# Altium PCB SLT_4U_V100.PcbDoc (part 2 of 6)
Units mm, origin at the board's own origin, x right, y up, seen from the top; angles counter-clockwise.
Board outline 180 x 80 mm, 5 copper layers (Top Layer, Mid-Layer 1, Mid-Layer 2, Mid-Layer 4, Bottom Layer); 1167 components, 840 nets, 3922 pads, 254 vias.
Unrouted connection lines stored in the file: 1943.
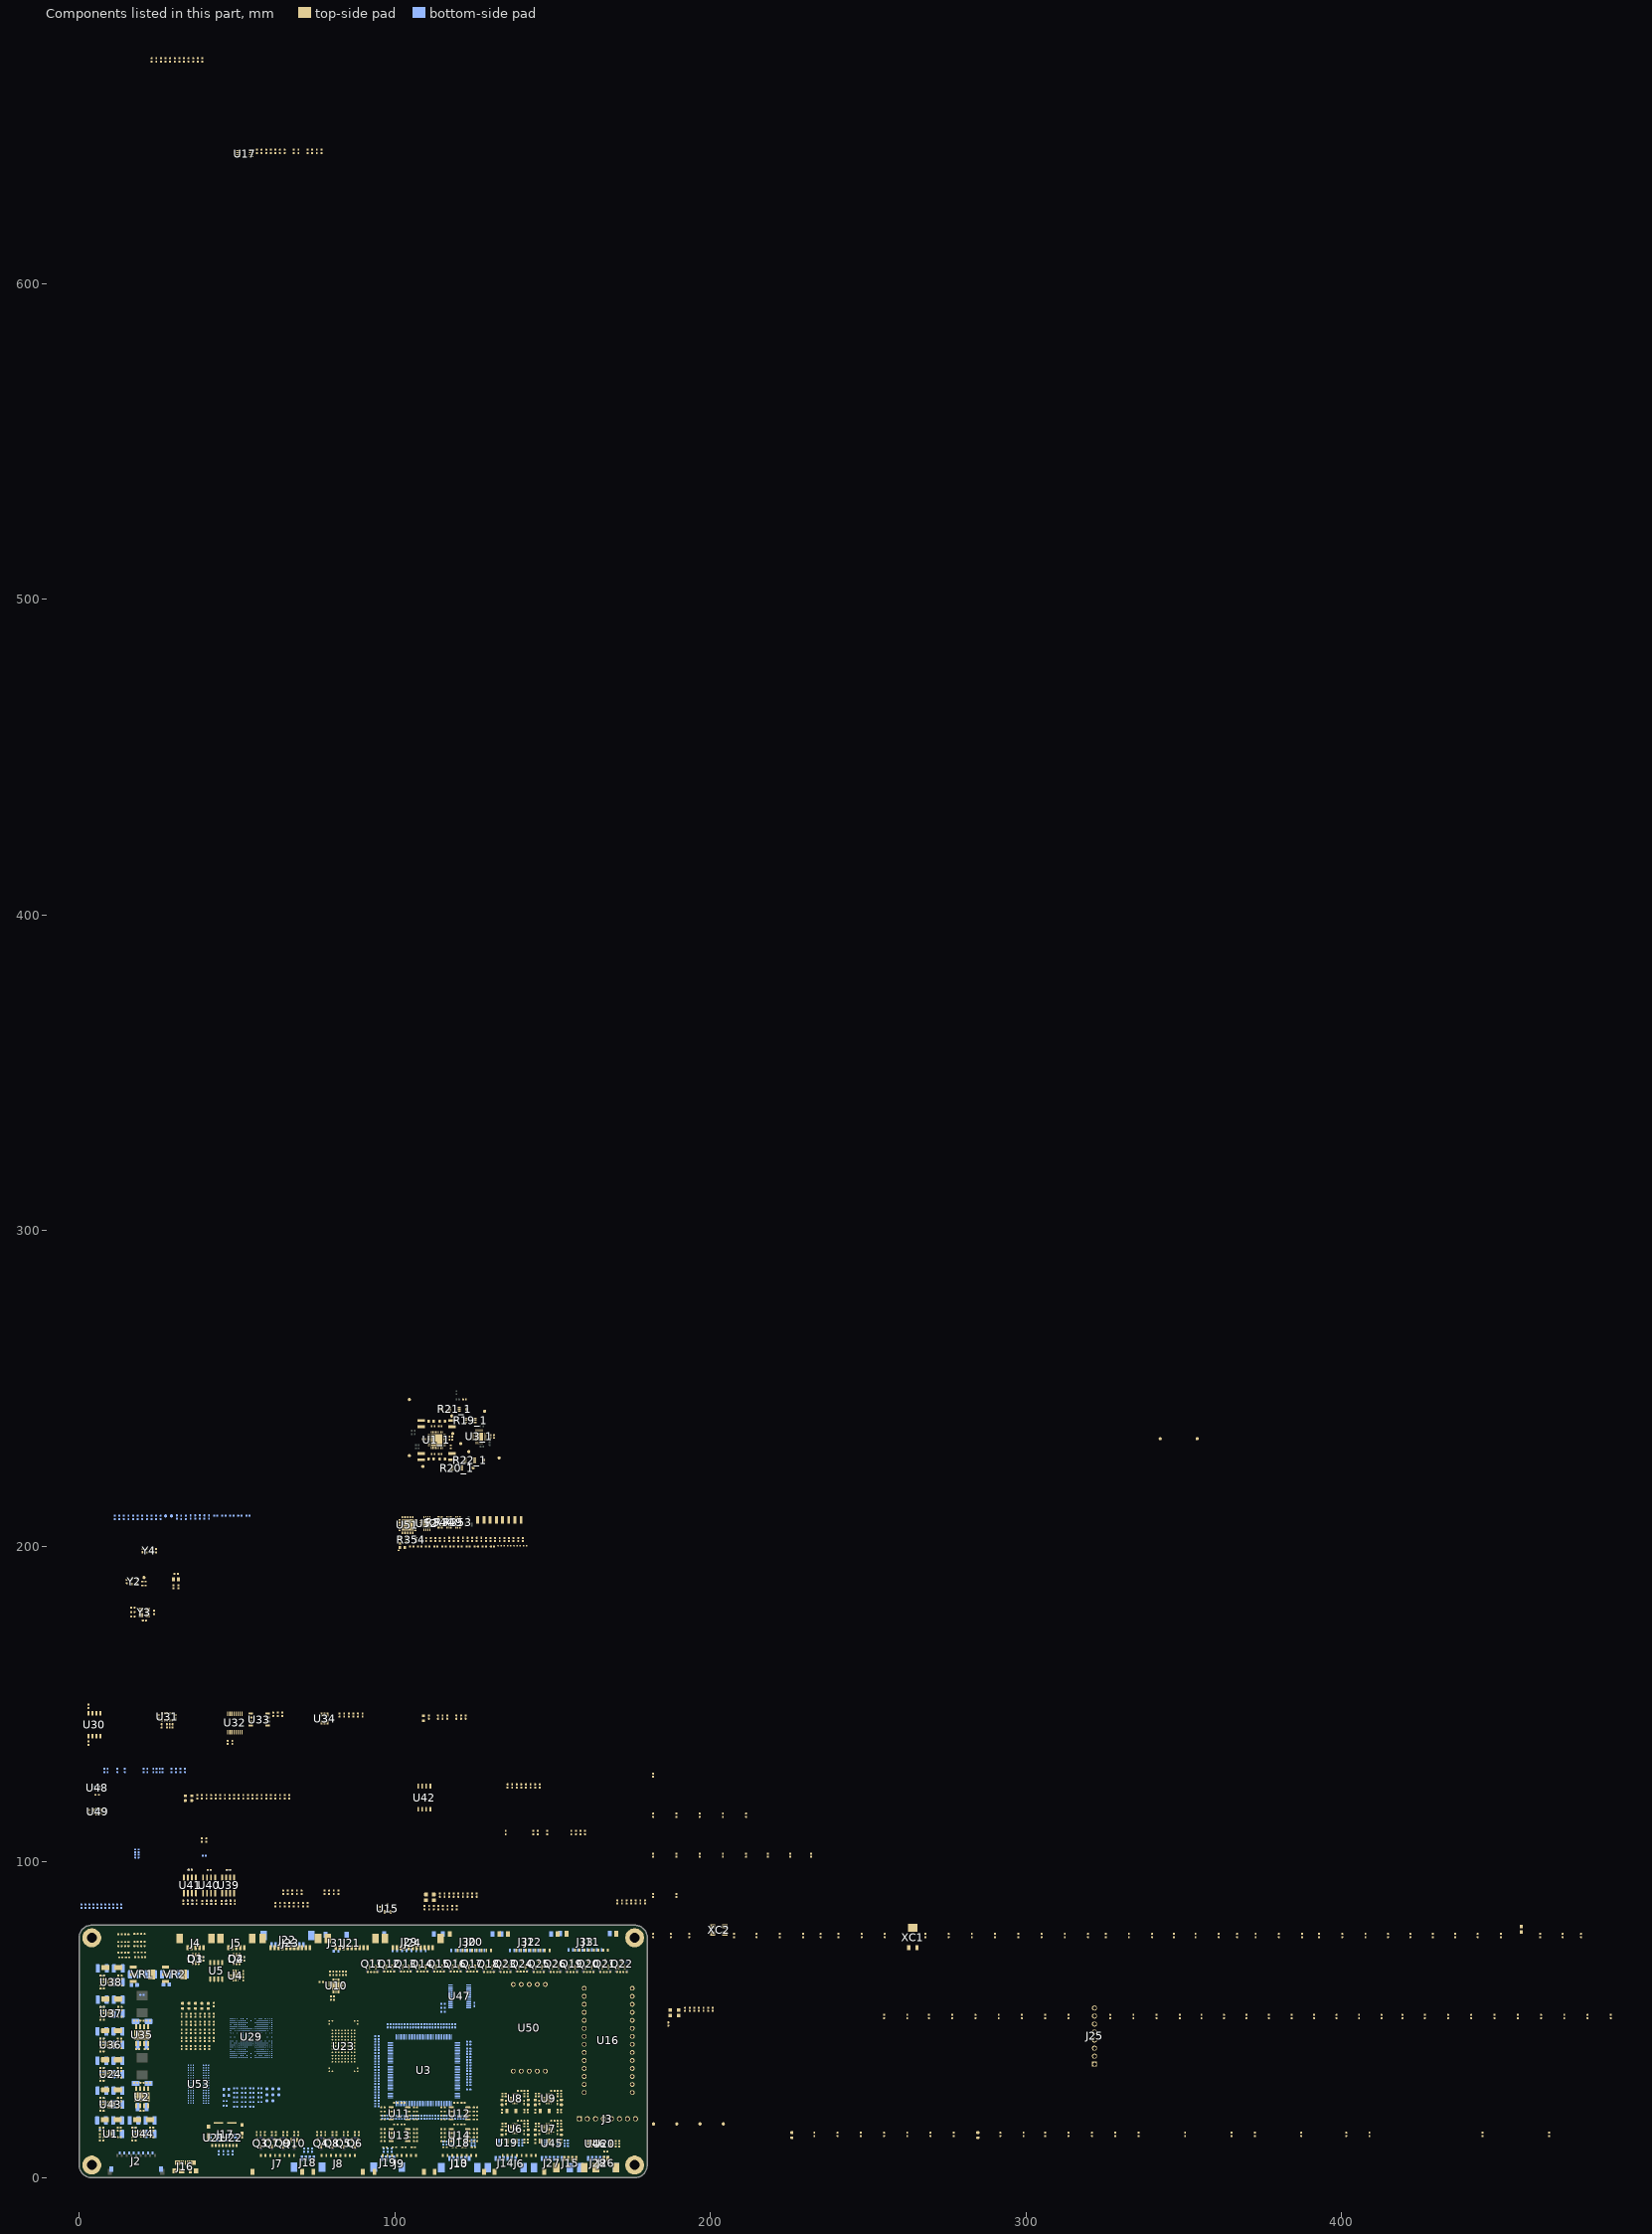
[diagram p3: the components of this part, seen from the top]

## Components (designator, comment, footprint, x,y, rotation, side; value= is the part's Value field where it differs from the comment) (continued)
R133 "22R" RES_C_1005X40#1 152.146,17.164 r0 top
R134 "10k" RES_C_1005X40#1 139.576,27.519 r180 top
R135 "10k" RES_C_1005X40#1 150.117,27.519 r180 top
R136 "47k" RES_C_1005X40#1 7.236,22.225 r180 top
R137 "47k" RES_C_1005X40#1 7.236,21.209 r180 top
R138 "1k" RES_C_1005X40#1 15.367,69.809 r180 top
R139 "10k" RES_C_1005X40#1 7.247,25.281 r180 top
R140 "10k" RES_C_1005X40#1 141.605,25.781 r0 top
R141 "4.7k" RES_C_1005X40#1 141.605,26.67 r0 top
R142 "10k" RES_C_1005X40#1 152.146,25.781 r0 top
R143 "22R" RES_C_1005X40#1 152.146,26.67 r0 top
R144 "10k" RES_C_1005X40#1 80.518,64.77 r90 top
R145 "10k" RES_C_1005X40#1 81.534,64.77 r90 top
R146 "10k" RES_C_1005X40#1 83.566,64.77 r270 top
R147 "10k" RES_C_1005X40#1 79.502,64.77 r270 top
R148 "10k" RES_C_1005X40#1 82.55,64.77 r270 top
R149 "10k" RES_C_1005X40#1 76.708,61.976 r0 top
R150 "22R" RES_C_1005X40#1 79.756,56.896 r90 top
R151 "22R" RES_C_1005X40#1 80.772,56.896 r90 top
R152 "120R" RES_C_1005X40#1 58.801,13.97 r270 top
R153 "120R" RES_C_1005X40#1 77.978,13.97 r270 top
R154 "120R" RES_C_1005X40#1 85.09,13.97 r270 top
R155 "10k" RES_C_1005X40#1 57.531,13.97 r270 top
R156 "10k" RES_C_1005X40#1 76.708,13.97 r270 top
R157 "10k" RES_C_1005X40#1 83.82,13.97 r270 top
R158 "120R" RES_C_1005X40#1 88.646,13.97 r270 top
R159 "120R" RES_C_1005X40#1 62.357,13.97 r270 top
R160 "120R" RES_C_1005X40#1 81.534,13.97 r270 top
R161 "10k" RES_C_1005X40#1 87.376,13.97 r270 top
R162 "10k" RES_C_1005X40#1 61.087,13.97 r270 top
R163 "10k" RES_C_1005X40#1 80.264,13.97 r270 top
R164 "120R" RES_C_1005X40#1 65.913,13.97 r270 top
R165 "10k" RES_C_1005X40#1 64.643,13.97 r270 top
R166 "120R" RES_C_1005X40#1 69.469,13.97 r270 top
R167 "10k" RES_C_1005X40#1 68.199,13.97 r270 top
R168 "22R" RES_C_1005X40#1 96.266,21 r180 top
R169 "22R" RES_C_1005X40#1 115.316,21 r180 top
R170 "22R" RES_C_1005X40#1 96.266,18.46 r0 top
R171 "22R" RES_C_1005X40#1 115.316,18.46 r0 top
R172 "10k" RES_C_1005X40#1 96.901,9.652 r0 top
R173 "10k" RES_C_1005X40#1 115.951,9.652 r0 top
R174 "22R" RES_C_1005X40#1 106.553,21 r0 top
R175 "22R" RES_C_1005X40#1 125.603,21 r0 top
R176 "22R" RES_C_1005X40#1 106.553,18.46 r180 top
R177 "22R" RES_C_1005X40#1 125.603,18.46 r180 top
R178 "10k" RES_C_1005X40#1 99.907,9.652 r0 top
R179 "10k" RES_C_1005X40#1 118.957,9.652 r0 top
R180 "22R" RES_C_1005X40#1 96.266,14.101 r180 top
R181 "22R" RES_C_1005X40#1 115.316,14.101 r180 top
R182 "22R" RES_C_1005X40#1 96.266,11.561 r0 top
R183 "22R" RES_C_1005X40#1 115.316,11.561 r0 top
R184 "10k" RES_C_1005X40#1 102.912,9.652 r0 top
R185 "10k" RES_C_1005X40#1 121.962,9.652 r0 top
R186 "22R" RES_C_1005X40#1 106.553,14.101 r0 top
R187 "22R" RES_C_1005X40#1 125.603,14.101 r0 top
R188 "22R" RES_C_1005X40#1 106.553,11.561 r180 top
R189 "22R" RES_C_1005X40#1 125.603,11.561 r180 top
R190 "10k" RES_C_1005X40#1 105.918,9.652 r0 top
R191 "10k" RES_C_1005X40#1 124.968,9.652 r0 top
R192 "4.7k" RES_C_1005X40#1 154.305,10.922 r180 bottom
R193 "DNP/4.7k" RES_C_1005X40#1 57.811,641.849 r90 top
R194 "DNP/4.7k" RES_C_1005X40#1 56.353,641.849 r90 top
R195 "DNP/4.7k" RES_C_1005X40#1 65.101,641.849 r90 top
R196 "DNP/4.7k" RES_C_1005X40#1 73.849,641.849 r90 top
R197 "4.7k" RES_C_1005X40#1 72.391,641.849 r90 top
R198 "4.7k" RES_C_1005X40#1 76.765,641.849 r90 top
R199 "4.7k" RES_C_1005X40#1 75.307,641.849 r90 top
R200 "4.7k" RES_C_1005X40#1 68.017,641.849 r90 top
R201 "4.7k" RES_C_1005X40#1 155.143,65.176 r180 top
R202 "4.7k" RES_C_1005X40#1 160.409,65.176 r180 top
R203 "10k" RES_C_1005X40#1 69.475,641.849 r90 top
R204 "133k" RES_C_1005X40#1 7.236,23.241 r0 top
R205 "4.7k" RES_C_1005X40#1 115.951,11.43 r0 bottom
R206 "4.7k" RES_C_1005X40#1 115.951,10.541 r0 bottom
R207 "4.7k" RES_C_1005X40#1 124.841,11.049 r180 bottom
R208 "4.7k" RES_C_1005X40#1 124.841,10.16 r180 bottom
R209 "1.6k" RES_C_1005X40#1 12.835,24.265 r180 top
R210 "DNP/10k" RES_C_1005X40#1 17.413,15.883 r0 bottom
R211 "470k" RES_C_1005X40#1 17.402,14.859 r180 top
R212 "47k" RES_C_1005X40#1 17.402,12.827 r180 top
R213 "10k" RES_C_1005X40#1 124.841,11.938 r0 bottom
R214 "47k" RES_C_1005X40#1 17.402,11.811 r180 top
R215 "4.7k" RES_C_1005X40#1 139.827,11.049 r180 bottom
R216 "4.7k" RES_C_1005X40#1 139.827,10.16 r180 bottom
R217 "10k" RES_C_1005X40#1 139.827,11.938 r0 bottom
R218 "4.7k" RES_C_1005X40#1 161.819,9.878 r0 top
R219 "4.7k" RES_C_1005X40#1 161.819,10.767 r0 top
R220 "4.7k" RES_C_1005X40#1 170.561,11.656 r180 top
R221 "4.7k" RES_C_1005X40#1 170.561,10.767 r180 top
R222 "1k" RES_C_1005X40#1 15.113,71.353 r180 top
R223 "10k" RES_C_1005X40#1 17.413,15.883 r180 top
R224 "133k" RES_C_1005X40#1 17.402,13.843 r0 top
R225 "10k" RES_C_1005X40#1 161.819,11.656 r180 top
R226 "10k" RES_C_1005X40#1 173.444,87.367 r90 top
R227 "DNP/10k" RES_C_1005X40#1 171.986,87.367 r90 top
R228 "DNP/10k" RES_C_1005X40#1 170.528,87.367 r90 top
R229 "DNP/10k" RES_C_1005X40#1 174.902,87.367 r90 top
R230 "DNP/10k" RES_C_1005X40#1 179.276,87.367 r90 top
R231 "DNP/10k" RES_C_1005X40#1 177.818,87.367 r90 top
R232 "DNP/10k" RES_C_1005X40#1 176.36,87.367 r90 top
R233 "10k" RES_C_1005X40#1 62.214,120.641 r90 top
R234 "10k" RES_C_1005X40#1 60.756,120.641 r90 top
R235 "10k" RES_C_1005X40#1 63.672,120.641 r90 top
R236 "10k" RES_C_1005X40#1 66.588,120.641 r90 top
R237 "10k" RES_C_1005X40#1 65.13,120.641 r90 top
R238 "10k" RES_C_1005X40#1 59.298,120.641 r90 top
R239 "10k" RES_C_1005X40#1 53.466,120.641 r90 top
R240 "10k" RES_C_1005X40#1 52.008,120.641 r90 top
R241 "10k" RES_C_1005X40#1 54.924,120.641 r90 top
R242 "10k" RES_C_1005X40#1 57.84,120.641 r90 top
R243 "10k" RES_C_1005X40#1 56.382,120.641 r90 top
R244 "10k" RES_C_1005X40#1 72.517,8.763 r90 bottom
R245 "10k" RES_C_1005X40#1 71.247,8.763 r90 bottom
R246 "10k" RES_C_1005X40#1 97.79,8.763 r90 bottom
R247 "10k" RES_C_1005X40#1 96.52,8.763 r90 bottom
R248 "DNP/10k" RES_C_1005X40#1 7.25,34.806 r0 bottom
R249 "470k" RES_C_1005X40#1 7.239,33.782 r180 top
R250 "47k" RES_C_1005X40#1 7.239,31.75 r180 top
R251 "47k" RES_C_1005X40#1 7.239,30.734 r180 top
R252 "10k" RES_C_1005X40#1 7.25,34.806 r180 top
R253 "2.2k" RES_C_1005X40#1 15.113,77.089 r180 top
R254 "133k" RES_C_1005X40#1 7.239,32.766 r0 top
R255 "1.6k" RES_C_1005X40#1 12.838,33.79 r180 top
R256 "2.2k" RES_C_1005X40#1 15.113,74.676 r180 top
R257 "10k" RES_C_1005X40#1 27.377,670.805 r90 top
R258 "10k" RES_C_1005X40#1 28.835,670.805 r90 top
R259 "DNP/10k" RES_C_1005X40#1 25.919,670.805 r90 top
R260 "10k" RES_C_1005X40#1 23.003,670.805 r90 top
R261 "10k" RES_C_1005X40#1 24.461,670.805 r90 top
R262 "DNP/10k" RES_C_1005X40#1 30.293,670.805 r90 top
R263 "10k" RES_C_1005X40#1 36.125,670.805 r90 top
R264 "10k" RES_C_1005X40#1 37.583,670.805 r90 top
R265 "DNP/10k" RES_C_1005X40#1 39.041,670.805 r90 top
R266 "10k" RES_C_1005X40#1 31.751,670.805 r90 top
R267 "10k" RES_C_1005X40#1 33.209,670.805 r90 top
R268 "DNP/10k" RES_C_1005X40#1 34.667,670.805 r90 top
R269 "10k" RES_C_1005X40#1 138.639,124.07 r90 top
R270 "10k" RES_C_1005X40#1 140.097,124.07 r90 top
R271 "10k" RES_C_1005X40#1 135.723,124.07 r90 top
R272 "10k" RES_C_1005X40#1 137.181,124.07 r90 top
R273 "10k" RES_C_1005X40#1 144.471,124.07 r90 top
R274 "10k" RES_C_1005X40#1 145.929,124.07 r90 top
R275 "10k" RES_C_1005X40#1 141.555,124.07 r90 top
R276 "10k" RES_C_1005X40#1 143.013,124.07 r90 top
R277 "22R" RES_C_1005X40#2 400.177,76.733 r90 top
R278 "22R" RES_C_1005X40#2 372.745,76.733 r90 top
R279 "22R" RES_C_1005X40#2 380.111,76.733 r90 top
R280 "22R" RES_C_1005X40#2 353.695,76.733 r90 top
R281 "22R" RES_C_1005X40#2 339.979,76.733 r90 top
R282 "22R" RES_C_1005X40#2 332.613,76.733 r90 top
R283 "22R" RES_C_1005X40#2 325.247,76.733 r90 top
R284 "22R" RES_C_1005X40#2 312.293,76.733 r90 top
R285 "4.7k" RES_C_1005X40#2 247.904,76.733 r90 top
R286 "22R" RES_C_1005X40#2 240.538,76.733 r90 top
R287 "4.7k" RES_C_1005X40#2 181.864,89.433 r90 top
R288 "4.7k" RES_C_1005X40#2 189.23,89.433 r90 top
R289 "DNP/4.7k" RES_C_1005X40#2 211.328,114.833 r90 top
R290 "4.7k" RES_C_1005X40#2 203.962,114.833 r90 top
R291 "10k" RES_C_1005X40#1 148.258,109.335 r90 top
R292 "10k" RES_C_1005X40#1 143.884,109.335 r90 top
R293 "10k" RES_C_1005X40#1 145.342,109.335 r90 top
R294 "10k" RES_C_1005X40#1 135.136,109.335 r90 top
R295 "4.7k" RES_C_1005X40#2 196.596,114.833 r90 top
R296 "4.7k" RES_C_1005X40#2 189.23,114.833 r90 top
R297 "DNP/4.7k" RES_C_1005X40#2 181.864,114.833 r90 top
R298 "2.2k" RES_C_1005X40#2 443.103,76.733 r90 top
R299 "22R" RES_C_1005X40#2 39.687,209.287 r90 bottom
R300 "22R" RES_C_1005X40#2 41.145,209.287 r90 bottom
R301 "200R" RES_C_1005X40#2 38.229,209.287 r90 bottom
R302 "10k" RES_C_1005X40#2 35.313,209.287 r90 bottom
R303 "DNP/10k" RES_C_1005X40#2 36.771,209.287 r90 bottom
R304 "22R" RES_C_1005X40#1 21.476,209.16 r90 bottom
R305 "22R" RES_C_1005X40#1 20.018,209.16 r90 bottom
R306 "DNP/10k" RES_C_1005X40#1 24.392,209.16 r90 bottom
R307 "200R" RES_C_1005X40#1 45.836,209.71 r180 bottom
R308 "22R" RES_C_1005X40#1 11.27,209.16 r270 bottom
R309 "22R" RES_C_1005X40#1 53.51,209.71 r180 bottom
R310 "200R" RES_C_1005X40#1 22.934,209.16 r90 bottom
R311 "16.9k" RES_C_1005X40#1 18.56,209.16 r270 bottom
R312 "22R" RES_C_1005X40#1 48.394,209.71 r180 bottom
R313 "20k" RES_C_1005X40#1 12.728,209.16 r90 bottom
R314 "22R" RES_C_1005X40#1 14.186,209.16 r270 bottom
R315 "20k" RES_C_1005X40#1 50.952,209.71 r180 bottom
R316 "22R" RES_C_1005X40#1 17.102,209.16 r90 bottom
R317 "16.9k" RES_C_1005X40#1 15.644,209.16 r270 bottom
R318 "22R" RES_C_1005X40#1 43.278,209.71 r180 bottom
R319 "22R" RES_C_1005X40#1 25.85,209.16 r90 bottom
R320 "22R" RES_C_1005X40#1 33.77,209.16 r270 bottom
R321 "4.02k" RES_C_1005X40#1 32.312,209.16 r90 bottom
R322 "51R" RES_C_1005X40#1 20.574,188.849 r0 top
R323 "0R" RES_C_1005X40#1 20.574,187.579 r0 top
R324 "1M" RES_C_1005X40#1 30.734,191.262 r180 top
R325 "DNP/0R" RES_C_1005X40#1 17.018,180.594 r180 top
R326 "DNP/0R" RES_C_1005X40#1 24.384,198.628 r270 top
R327 "1M 1%" RES_C_1005X40#1 17.018,179.197 r180 top
R328 "DNP/0R" RES_C_1005X40#1 17.018,177.8 r180 top
R329 "4.7k" RES_C_1005X40#1 118.138,199.938 r0 top
R330 "4.7k" RES_C_1005X40#1 117.229,202.171 r90 top
R331 "0R" RES_C_1005X40#1 118.687,202.171 r90 top
R333 "0R" RES_C_1005X40#1 115.58,199.938 r0 top
R335 "1k" RES_C_1005X40#1 127.435,202.171 r270 top
R336 "10k" RES_C_1005X40#1 124.519,202.171 r270 top
R337 "10k" RES_C_1005X40#1 123.254,199.938 r0 top
R338 "0R" RES_C_1005X40#1 123.061,202.171 r270 top
R339 "100k" RES_C_1005X40#1 120.696,199.938 r180 top
R340 "10k" RES_C_1005X40#1 107.906,199.938 r180 top
R341 "1.6k" RES_C_1005X40#1 23.001,14.867 r180 top
R342 "10k" RES_C_1005X40#1 105.348,199.938 r180 top
R343 "22R" RES_C_1005X40#1 113.022,199.938 r180 top
R344 "Shunt 4 Pin" RES_C_1206_SHUNT 114.406,207.554 r270 top value=0.01R
R345 "22R" RES_C_1005X40#1 110.464,199.938 r180 top
R346 "10k" RES_C_1005X40#1 125.977,202.171 r270 top
R347 "4.7k" RES_C_1005X40#1 154.305,10.033 r180 bottom
R348 "10k" RES_C_1005X40#1 125.812,199.938 r180 top
R349 "Shunt 4 Pin" RES_C_1206_SHUNT 117.214,207.554 r90 top value=0.01R
R350 "10k" RES_C_1005X40#1 120.145,202.171 r90 top
R351 "0R" RES_C_1005X40#1 128.37,199.938 r0 top
R352 "0R" RES_C_1005X40#1 121.603,202.171 r270 top
R353 "Shunt 4 Pin" RES_C_1206_SHUNT 119.997,207.554 r90 top value=0.01R
R354 "Shunt 4 Pin" RES_C_1206_SHUNT 105.248,202.071 r180 top value=0.01R
R355 "22R" RES_C_1005X40#1 20.422,129.032 r270 bottom
R356 "22R" RES_C_1005X40#1 18.305,101.427 r0 bottom
R357 "22R" RES_C_1005X40#1 21.607,129.032 r90 bottom
R358 "22R" RES_C_1005X40#1 18.305,102.27 r0 bottom
R359 "22R" RES_C_1005X40#1 13.294,85.996 r90 bottom
R360 "22R" RES_C_1005X40#1 18.305,103.112 r0 bottom
R361 "22R" RES_C_1005X40#1 12.035,85.996 r90 bottom
R362 "22R" RES_C_1005X40#1 18.305,103.955 r0 bottom
R363 "22R" RES_C_1005X40#1 23.512,129.032 r270 bottom
R364 "22R" RES_C_1005X40#1 10.775,85.996 r90 bottom
R365 "22R" RES_C_1005X40#1 9.516,85.996 r90 bottom
R366 "22R" RES_C_1005X40#1 25.544,129.032 r270 bottom
R367 "22R" RES_C_1005X40#1 26.433,129.032 r270 bottom
R368 "22R" RES_C_1005X40#1 8.256,85.996 r90 bottom
R369 "22R" RES_C_1005X40#1 6.997,85.996 r90 bottom
R370 "22R" RES_C_1005X40#1 5.737,85.996 r90 bottom
R371 "22R" RES_C_1005X40#1 4.478,85.996 r90 bottom
R372 "22R" RES_C_1005X40#1 29.255,129.032 r270 bottom
R373 "22R" RES_C_1005X40#1 77.752,90.415 r90 top
R374 "22R" RES_C_1005X40#1 3.219,85.996 r90 bottom
R375 "22R" RES_C_1005X40#1 30.685,129.032 r270 bottom
R376 "22R" RES_C_1005X40#1 1.959,85.996 r90 bottom
R377 "22R" RES_C_1005X40#1 32.115,129.032 r270 bottom
R378 "22R" RES_C_1005X40#1 0.7,85.996 r90 bottom
R379 "22R" RES_C_1005X40#1 33.545,129.032 r270 bottom
R380 "22R" RES_C_1005X40#1 66.088,90.415 r90 top
R381 "22R" RES_C_1005X40#1 64.63,90.415 r90 top
R382 "22R" RES_C_1005X40#1 67.546,90.415 r90 top
R383 "22R" RES_C_1005X40#1 70.462,90.415 r90 top
R384 "22R" RES_C_1005X40#1 69.004,90.415 r90 top
R385 "22R" RES_C_1005X40#1 68.029,86.457 r90 top
R386 "22R" RES_C_1005X40#1 66.571,86.457 r90 top
R387 "22R" RES_C_1005X40#1 69.487,86.457 r90 top
R388 "22R" RES_C_1005X40#1 72.403,86.457 r90 top
R389 "22R" RES_C_1005X40#1 70.945,86.457 r90 top
R390 "DNP/10k" RES_C_1005X40#1 65.113,86.457 r90 top
R391 "DNP/10k" RES_C_1005X40#1 80.668,90.415 r90 top
R392 "22R" RES_C_1005X40#1 79.21,90.415 r90 top
R393 "DNP/10k" RES_C_1005X40#1 82.126,90.415 r90 top
R394 "DNP/10k" RES_C_1005X40#1 63.655,86.457 r90 top
R395 "22R" RES_C_1005X40#1 62.197,86.457 r90 top
R396 "4.7k" RES_C_1005X40#1 2.921,137.668 r270 top
R397 "4.7k" RES_C_1005X40#1 27.813,143.129 r270 top
R398 "4.7k" RES_C_1005X40#1 30.607,146.05 r270 top
R399 "4.7k" RES_C_1005X40#1 28.702,143.129 r270 top
R400 "4.7k" RES_C_1005X40#1 29.591,143.129 r270 top
R401 "4.7k" RES_C_1005X40#1 26.162,143.129 r90 top
R402 "1k" RES_C_1005X40#1 82.514,146.549 r90 top
R403 "4.7k" RES_C_1005X40#1 61.483,146.803 r90 top
R404 "4.7k" RES_C_1005X40#1 64.399,146.803 r90 top
R405 "4.7k" RES_C_1005X40#1 48.542,137.914 r90 top
R406 "4.7k" RES_C_1005X40#1 47.084,137.914 r90 top
R407 "10k" RES_C_1005X40#1 85.43,146.549 r90 top
R408 "22R" RES_C_1005X40#1 89.804,146.549 r90 top
R409 "16.5k/1%" RES_C_1005X40#1 88.346,146.549 r90 top
R410 "16.5k/1%" RES_C_1005X40#1 86.888,146.549 r90 top
R411 "10k" RES_C_1005X40#1 18.542,40.767 r0 top
R412 "10k" RES_C_1005X40#1 19.939,49.767 r0 top
R413 "2.2k" RES_C_1005X40#1 20.43,69.85 r180 top
R414 "DNP/10k" RES_C_1005X40#1 21.336,40.767 r0 top
R415 "3.24k" RES_C_1005X40#1 17.907,49.767 r0 top
R416 "DNP/10k" RES_C_1005X40#1 7.25,44.077 r0 bottom
R417 "470k" RES_C_1005X40#1 7.239,43.053 r180 top
R418 "47k" RES_C_1005X40#1 7.239,41.021 r180 top
R419 "47k" RES_C_1005X40#1 7.239,40.005 r180 top
R420 "1k" RES_C_1005X40#1 20.21,77.216 r180 top
R421 "10k" RES_C_1005X40#1 7.25,44.077 r180 top
R422 "133k" RES_C_1005X40#1 7.239,42.037 r0 top
R423 "1.6k" RES_C_1005X40#1 12.838,43.061 r180 top
R424 "DNP/10k" RES_C_1005X40#1 7.334,54.078 r0 bottom
R425 "470k" RES_C_1005X40#1 7.323,53.054 r180 top
R426 "47k" RES_C_1005X40#1 7.323,51.022 r180 top
R427 "47k" RES_C_1005X40#1 7.323,50.006 r180 top
R428 "2.2k" RES_C_1005X40#1 20.337,71.374 r180 top
R429 "10k" RES_C_1005X40#1 7.334,54.078 r180 top
R430 "133k" RES_C_1005X40#1 7.323,52.038 r0 top
R431 "1.6k" RES_C_1005X40#1 12.922,53.062 r180 top
R432 "DNP/10k" RES_C_1005X40#1 7.349,64.008 r0 bottom
R433 "470k" RES_C_1005X40#1 7.338,62.984 r180 top
R434 "47k" RES_C_1005X40#1 7.338,60.952 r180 top
R435 "47k" RES_C_1005X40#1 7.338,59.936 r180 top
R436 "2.2k" RES_C_1005X40#1 20.219,74.732 r180 top
R437 "10k" RES_C_1005X40#1 7.349,64.008 r180 top
R438 "133k" RES_C_1005X40#1 7.338,61.968 r0 top
R439 "1.6k" RES_C_1005X40#1 12.937,62.992 r180 top
R440 "22R" RES_C_1005X40#1 47.948,87.217 r90 top
R441 "60R" RES_C_1005X40#1 47.948,87.217 r90 bottom
R442 "60R" RES_C_1005X40#1 46.551,87.217 r270 bottom
R443 "10k" RES_C_1005X40#1 49.345,87.217 r90 top
R444 "22R" RES_C_1005X40#1 46.551,87.217 r90 top
R445 "22R" RES_C_1005X40#1 41.852,87.217 r90 top
R446 "60R" RES_C_1005X40#1 41.852,87.217 r90 bottom
R447 "60R" RES_C_1005X40#1 40.455,87.217 r270 bottom
R448 "10k" RES_C_1005X40#1 43.249,87.217 r90 top
R449 "22R" RES_C_1005X40#1 40.455,87.217 r90 top
R450 "22R" RES_C_1005X40#1 35.814,87.249 r90 top
R451 "60R" RES_C_1005X40#1 35.814,87.249 r90 bottom
R452 "60R" RES_C_1005X40#1 34.417,87.249 r270 bottom
R453 "10k" RES_C_1005X40#1 37.211,87.249 r90 top
R454 "22R" RES_C_1005X40#1 34.417,87.249 r90 top
R455 "4.7k" RES_C_1005X40#1 38.849,106.925 r90 top
R456 "22R" RES_C_1005X40#1 8.018,129.032 r270 bottom
R457 "22R" RES_C_1005X40#1 9.034,129.032 r270 bottom
R458 "22R" RES_C_1005X40#1 12.124,129.032 r270 bottom
R459 "22R" RES_C_1005X40#1 14.495,129.032 r270 bottom
R460 "DNP/10k" RES_C_1005X40#1 39.641,101.981 r180 bottom
R461 "DNP/10k" RES_C_1005X40#1 24.528,129.032 r270 bottom
R462 "10k" RES_C_1005X40#1 154.305,11.811 r0 bottom
R463 "4.7k" RES_C_1005X40#1 168.148,10.795 r180 bottom
R464 "4.7k" RES_C_1005X40#1 168.148,9.906 r180 bottom
R465 "10k" RES_C_1005X40#1 168.148,11.684 r0 bottom
R466 "4.7k" RES_C_1005X40#1 91.948,65.151 r180 top
R467 "4.7k" RES_C_1005X40#1 97.214,65.278 r180 top
R468 "4.7k" RES_C_1005X40#1 102.481,65.278 r180 top
R469 "4.7k" RES_C_1005X40#1 107.747,65.278 r180 top
R470 "10k" RES_C_1005X40#1 93.98,65.151 r180 top
R471 "10k" RES_C_1005X40#1 99.246,65.278 r180 top
R472 "10k" RES_C_1005X40#1 104.513,65.278 r180 top
R473 "10k" RES_C_1005X40#1 109.779,65.278 r180 top
R474 "4.7k" RES_C_1005X40#1 113.013,65.262 r180 top
R475 "4.7k" RES_C_1005X40#1 118.279,65.278 r180 top
R476 "4.7k" RES_C_1005X40#1 123.546,65.278 r180 top
R477 "4.7k" RES_C_1005X40#1 128.812,65.151 r180 top
R478 "10k" RES_C_1005X40#1 115.045,65.262 r180 top
R479 "10k" RES_C_1005X40#1 120.311,65.278 r180 top
R480 "10k" RES_C_1005X40#1 125.578,65.278 r180 top
R481 "10k" RES_C_1005X40#1 130.844,65.151 r180 top
R482 "4.7k" RES_C_1005X40#1 115.316,53.848 r0 bottom
R483 "4.7k" RES_C_1005X40#1 115.316,55.118 r0 bottom
R484 "4.7k" RES_C_1005X40#1 5.715,121.285 r180 top
R485 "22R" RES_C_1005X40#2 485.267,51.079 r90 top
R486 "22R" RES_C_1005X40#2 470.535,51.079 r90 top
R487 "22R" RES_C_1005X40#2 477.901,51.079 r90 top
R488 "DNP/10k" RES_C_1005X40#2 455.803,51.079 r90 top
R489 "4.7k" RES_C_1005X40#1 8.509,116.078 r90 top
R490 "4.7k" RES_C_1005X40#1 3.175,115.951 r90 top
R491 "4.7k" RES_C_1005X40#1 165.676,65.176 r180 top
R492 "4.7k" RES_C_1005X40#1 170.942,65.176 r180 top
R493 "10k" RES_C_1005X40#1 157.175,65.176 r180 top
R494 "10k" RES_C_1005X40#1 162.441,65.176 r180 top
R495 "10k" RES_C_1005X40#1 167.708,65.176 r180 top
R496 "10k" RES_C_1005X40#1 172.974,65.176 r180 top
R497 "4.7k" RES_C_1005X40#1 134.078,65.176 r180 top
R498 "4.7k" RES_C_1005X40#1 139.344,65.278 r180 top
R499 "4.7k" RES_C_1005X40#1 144.611,65.176 r180 top
R500 "4.7k" RES_C_1005X40#1 149.877,65.176 r180 top
R501 "10k" RES_C_1005X40#1 136.11,65.176 r180 top
R502 "10k" RES_C_1005X40#1 141.376,65.278 r180 top
R503 "10k" RES_C_1005X40#1 146.643,65.176 r180 top
R504 "10k" RES_C_1005X40#1 151.909,65.176 r180 top
R505 "DNP/10k" RES_C_1005X40#2 463.169,51.079 r90 top
R506 "DNP/10k" RES_C_1005X40#2 441.071,51.079 r90 top
R507 "DNP/10k" RES_C_1005X40#2 448.437,51.079 r90 top
R508 "DNP/10k" RES_C_1005X40#2 426.339,51.079 r90 top
R509 "DNP/10k" RES_C_1005X40#2 433.705,51.079 r90 top
R510 "22R" RES_C_1005X40#2 419.227,51.079 r90 top
R511 "22R" RES_C_1005X40#2 412.623,51.079 r90 top
R512 "22R" RES_C_1005X40#2 405.511,51.079 r90 top
R513 "22R" RES_C_1005X40#2 398.399,51.079 r90 top
R514 "22R" RES_C_1005X40#2 391.287,51.079 r90 top
R515 "22R" RES_C_1005X40#2 384.175,51.079 r90 top
R516 "22R" RES_C_1005X40#2 369.824,51.079 r90 top
R517 "22R" RES_C_1005X40#2 376.936,51.079 r90 top
R518 "22R" RES_C_1005X40#2 355.6,51.079 r90 top
R519 "22R" RES_C_1005X40#2 362.712,51.079 r90 top
R520 "22R" RES_C_1005X40#2 341.376,51.079 r90 top
R521 "22R" RES_C_1005X40#2 348.742,51.079 r90 top
R522 "22R" RES_C_1005X40#2 326.644,51.079 r90 top
R523 "22R" RES_C_1005X40#2 334.01,51.079 r90 top
R524 "22R" RES_C_1005X40#2 306.07,51.079 r90 top
R525 "22R" RES_C_1005X40#2 313.436,51.079 r90 top
R526 "22R" RES_C_1005X40#2 291.338,51.079 r90 top
R527 "22R" RES_C_1005X40#2 298.704,51.079 r90 top
R528 "22R" RES_C_1005X40#2 283.972,51.079 r90 top
R529 "22R" RES_C_1005X40#2 276.606,51.079 r90 top
R530 "22R" RES_C_1005X40#2 269.24,51.079 r90 top
R531 "22R" RES_C_1005X40#2 262.382,51.079 r90 top
R532 "22R" RES_C_1005X40#2 255.016,51.079 r90 top
R533 "DNP/100k" RES_C_1005X40#2 191.973,53.331 r90 top
R534 "10k" RES_C_1005X40#2 200.721,53.331 r90 top
R535 "10k" RES_C_1005X40#2 186.657,48.673 r90 top
R536 "10k" RES_C_1005X40#2 199.263,53.331 r90 top
R537 "2.2k" RES_C_1005X40#2 196.347,53.331 r90 top
R538 "2.2k" RES_C_1005X40#2 197.805,53.331 r90 top
R539 "240R" RES_C_1005X40#2 54.711,22.522 r180 bottom
R540 "100k" RES_C_1005X40#2 465.709,13.741 r90 top
R541 "240R" RES_C_1005X40#2 444.627,13.741 r90 top
R542 "1k" RES_C_1005X40#2 320.929,13.741 r90 top
R543 "1k" RES_C_1005X40#2 255.016,13.741 r90 top
TP1 "" TP_1mm_SMD#1 354.203,234.086 r90 top
TP1_1 "Test Point No BOM" TP_1mm_SMD#2 108.872,225.288 r90 top value="TP PAD PCB 1mm" (schematic designator TP1)
TP2 "" TP_1mm_SMD#1 342.519,234.086 r90 top
TP3 "" TP_1mm_SMD#1 27.393,209.627 r90 bottom
TP3_1 "Test Point No BOM" TP_1mm_SMD#2 123.447,229.963 r90 top value="TP PAD PCB 1mm" (schematic designator TP3)
TP4 "" TP_1mm_SMD#1 29.271,209.627 r90 bottom
TP4_1 "Test Point No BOM" TP_1mm_SMD#2 104.622,246.488 r180 top value="TP PAD PCB 1mm" (schematic designator TP4)
TP5 "" TP_1mm_SMD#1 20.574,190.119 r90 top
TP5_1 "Test Point No BOM" TP_1mm_SMD#2 118.072,241.288 r90 top value="TP PAD PCB 1mm" (schematic designator TP5)
TP6 "" Testpoint_50 136.743,200.163 r90 top
TP6_1 "Test Point No BOM" TP_1mm_SMD#2 114.922,243.413 r90 top value="TP PAD PCB 1mm" (schematic designator TP6)
TP7 "" Testpoint_50 140.775,200.163 r90 top
TP7_1 "Test Point No BOM" TP_1mm_SMD#2 120.897,232.538 r90 top value="TP PAD PCB 1mm" (schematic designator TP7)
TP8 "" Testpoint_50 101.215,198.705 r90 top
TP8_1 "Test Point No BOM" TP_1mm_SMD#2 118.372,235.738 r90 top value="TP PAD PCB 1mm" (schematic designator TP8)
TP9 "" Testpoint_50 137.751,200.163 r90 top
TP9_1 "Test Point No BOM" TP_1mm_SMD#2 104.622,228.713 r90 top value="TP PAD PCB 1mm" (schematic designator TP9)
TP10 "" Testpoint_50 139.767,200.163 r90 top
TP10_1 "Test Point No BOM" TP_1mm_SMD#2 128.472,242.813 r90 top value="TP PAD PCB 1mm" (schematic designator TP10)
TP11 "" Testpoint_50 138.759,200.163 r90 top
TP11_1 "Test Point No BOM" TP_1mm_SMD#2 124.822,224.913 r90 top value="TP PAD PCB 1mm" (schematic designator TP11)
TP12 "" Testpoint_50 141.783,200.163 r90 top
TP12_1 "Test Point No BOM" TP_1mm_SMD#2 122.747,243.413 r90 top value="TP PAD PCB 1mm" (schematic designator TP12)
TP13 "" Testpoint_50 133.719,200.163 r90 top
TP13_1 "Test Point No BOM" TP_1mm_SMD#2 128.147,227.338 r90 top value="TP PAD PCB 1mm" (schematic designator TP13)
TP14 "" Testpoint_50 132.711,200.163 r90 top
TP15 "" Testpoint_50 135.735,200.163 r90 top
TP16 "" Testpoint_50 134.727,200.163 r90 top
TP17 "" TP_1mm_SMD#1 61.365,24.388 r180 bottom
TP18 "" TP_1mm_SMD#1 61.365,26.266 r180 bottom
TP19 "" TP_1mm_SMD#1 63.243,26.266 r180 bottom
TP20 "" TP_1mm_SMD#1 63.243,28.144 r180 bottom
TP21 "" TP_1mm_SMD#1 59.487,26.266 r180 bottom
TP22 "" TP_1mm_SMD#1 59.487,28.144 r180 bottom
TP23 "" TP_1mm_SMD#1 61.365,28.144 r180 bottom
TP24 "" TP_1mm_SMD#1 59.487,24.388 r180 bottom
TP25 "" TP_1mm_SMD#1 181.991,17.043 r90 top
TP26 "" TP_1mm_SMD#1 189.357,17.043 r90 top
TP27 "" TP_1mm_SMD#1 196.723,17.043 r90 top
TP28 "" TP_1mm_SMD#1 204.089,17.043 r90 top
TP28_1 "Test Point No BOM" TP_1mm_SMD#2 133.072,228.013 r90 top value="TP PAD PCB 1mm" (schematic designator TP28)
U1 "TPS259470ARPWR" VQFN-HR-10 9.917,13.851 r0 top
U1_1 "MCP16502 QFN-32" QFN-32_5X5_EP3.7X3.7 113.297,233.663 r0 top value=MCP16502TAB-E/S8B (schematic designator U1)
U2 "TPS5430DDAR" TPS5430DDAR_V3 19.939,25.527 r270 top
U3 "SAMV71Q21B" AP6-00118 109.22,34.036 r180 bottom
U3_1 "PAC1934 UQFN-16" UQFN-16_4X4_EP2.6X2.6 126.722,234.763 r180 top value=PAC1934 (schematic designator U3)
U4 "FSUSB74MPX" QFN50P300X300X80-17N 49.53,64.008 r90 top
U5 "IC_PWRSW_MIC2026-1YM" SOIC127P602X173-8N 43.434,65.532 r90 top
U6 "LT8722AV#PBF" QFN18 138.176,15.513 r270 top
U7 "LT8722AV#PBF" QFN18 148.717,15.513 r270 top
U8 "LT8722AV#PBF" QFN18 138.176,25.019 r270 top
U9 "LT8722AV#PBF" QFN18 148.717,25.019 r270 top
U10 "IC_SW_MAX14662ETI+T" QFN40P400X400X80-29N 81.377,60.776 r0 top
U11 "OPA2340UA" SOIC127P602X173-8N 101.473,20.365 r0 top
U12 "OPA2340UA" SOIC127P602X173-8N 120.523,20.365 r0 top
U13 "OPA2340UA" SOIC127P602X173-8N 101.473,13.466 r0 top
U14 "OPA2340UA" SOIC127P602X173-8N 120.523,13.466 r0 top
U15 "TC1047AVNBTR" SOT95P240X120-3N 97.737,85.197 r90 top
U16 "mp-HighDriver4" MP_HIGHDRIVER4 167.64,43.5 r90 top
U17 "PCA9508DP,118" TSOP8 52.47,641.124 r0 top
U18 "PCA9508DP,118" TSOP8 120.396,11.049 r0 bottom
U19 "PCA9508DP,118" TSOP8 135.382,11.049 r0 bottom
U20 "PCA9508DP,118" TSOP8 166.264,10.767 r180 top
U21 "IP4220CZ6" SOT95P280X145-6N 42.672,12.7 r0 bottom
U22 "IP4220CZ6" SOT95P280X145-6N 48.26,12.7 r0 bottom
U23 "MTFC32GAZAQDW-AAT" BGA_100_C_100P_10X17_1400X1800X150 83.764,41.688 r0 top
U24 "TPS259470ARPWR" VQFN-HR-10 10.044,32.774 r0 top
U29 "SAMA7G54" TFBGA-343_14x14 54.498,44.562 r270 bottom
U30 "AS3004204-0108X0PSAY" SOIC127P790X216-8 4.826,143.485 r90 top
U31 "RV-3129-C3-32.768KHZ-OPTION-A-TB-QA" IC_RV-3129-C3_32.768KHZ_OPTION_A_TB_QA 27.864,146.007 r90 top
U32 "SN3257QPWRQ1" SOIC_PRQ1_TEX 49.365,144.069 r90 top
U33 "IS66WVS8M8FBLL-104NLI" SOIC8_150MIL_N_ISI 57.046,145.123 r0 top
U34 "TPL5010QDDCTQ1" SOT95P280X145-6N 77.798,145.449 r90 top
U35 "TPS5430DDAR" TPS5430DDAR_V3 19.939,45.195 r270 top
U36 "TPS259470ARPWR" VQFN-HR-10 10.044,42.045 r0 top
U37 "TPS259470ARPWR" VQFN-HR-10 10.128,52.046 r0 top
U38 "TPS259470ARPWR" VQFN-HR-10 10.143,61.976 r0 top
U39 "SN65HVD230DR" SOIC127P599X175-8N 47.244,92.583 r270 top
U40 "SN65HVD230DR" SOIC127P599X175-8N 41.148,92.583 r270 top
U41 "SN65HVD230DR" SOIC127P599X175-8N 35.11,92.615 r270 top
U42 "AS3004204-0108X0PSAY" SOIC127P790X216-8 109.347,120.396 r90 top
U43 "TPS259470ARPWR" VQFN-HR-10 10.041,23.249 r0 top
U44 "TPS259470ARPWR" VQFN-HR-10 20.207,13.851 r0 top
U45 "PCA9508DP,118" TSOP8 149.86,10.922 r0 bottom
U46 "PCA9508DP,118" TSOP8 163.703,10.795 r0 bottom
U47 "TCA6416APWR" SOP65P440W-24N 120.544,57.475 r0 bottom
U48 "BMP390" 10LGA_2X2X0p75_BOS 5.715,123.444 r270 top
U49 "LSM6DSOXTR" PQFN50P250X300X86-14N 5.846,115.985 r0 top
U50 "MPD-200A" MPD-200A 142.621,47.498 r90 top
U51 "MCP16502 QFN-32" QFN-32_5X5_EP3.7X3.7 104.015,206.754 r0 top value=MCP16502TAB-E/S8B
U52 "PAC1934 UQFN-16" UQFN-16_4X4_EP2.6X2.6 110.173,207.204 r0 top value=PAC1934
U53 "IS43TR16512BL-125KBLI" TWBGA96_ISI 37.795,29.623 r0 bottom
VR1 "LM1117MP-3.3/NOPB" VREG_LM1117MP-3.3/NOPB 20.066,64.389 r0 top
VR2 "LM1117MP-3.3/NOPB" VREG_LM1117MP-3.3/NOPB 30.226,64.389 r0 top
XC1 "Farnell order no:1539364" AP7-00044 264.16,72.923 r0 top value="32.768kHz +/-20PPM 7pF  SMD"
XC2 "" AP7-00039 202.692,78.511 r0 top value=12.00MHz
Y1 "Crystal 2 Pins" CRYSTAL_NX2012SA 30.657,189.561 r0 top value=32.768kHz
Y2 "DSC10xx DFN-4" DFN-4_2.5x2 17.528,188.854 r0 top value=24MHz
Y3 "Crystal 4 Pins" CRYSTAL_ABM8G 20.701,179.07 r0 top value=24MHz
Y4 "DSC60xx DFN-4_LGA-4" DFN-4_2x1.6 22.223,198.6 r0 top value=32.768KHz

## Footprints (in the part's own frame and the unit in brackets; to place one, negate y for a bottom-side part, rotate by r counter-clockwise, add the part's x,y. Pads: shape width x height; smd on the part's side, far side on the other; paste and mask are expansions set on the pad)
10LGA_2X2X0p75_BOS [mil]
  rect 11x10 smd paste+0 mask+0: 1(-31,9.84) 2(-31,-9.84) 6(31,-9.84) 7(31,9.84)
  rect 10x11 smd paste+0 mask+0: 3(-19.69,-31) 4(0,-31) 5(19.69,-31) 8(19.69,31) 9(0,31) 10(-19.69,31)
  silkscreen extent -56,-46 46,46, body extent -41,-41 41,41, height 32
47346-0001_MOL [mm]
  rrect50% 0.457x1.372 smd: 1(-1.3,2.58) 2(-0.65,2.58) 3(0,2.58) 4(0.65,2.58) 5(1.3,2.58)
  rect 1.3x1.6 smd paste-0.1: 6(-3.375,-0.08) 6(3.375,-0.08)
  rect 1.549x1.422 smd paste-0.1: 6(-2.488,2.495) 6(2.488,2.495)
  rect 1.8x1.6 smd paste-0.1: 6(-1.15,-0.08)
  rect 1x1.6 smd paste-0.1: 6(1.549,-0.08)
  silkscreen extent -3.95,1.08 2.97,3.05, body extent -3.99,-2.78 3.99,2.65, height 2.69
AP6-00118 [mm]
  oval 1.7x0.3 smd: 1(-10.6,8.75) 2(-10.6,8.25) 3(-10.6,7.75) 4(-10.6,7.25) 5(-10.6,6.75) 6(-10.6,6.25) 7(-10.6,5.75) 8(-10.6,5.25) 9(-10.6,4.75) 10(-10.6,4.25) 11(-10.6,3.75) 12(-10.6,3.25) 13(-10.6,2.75) 14(-10.6,2.25) 15(-10.6,1.75) 16(-10.6,1.25) 17(-10.6,0.75) 18(-10.6,0.25) 19(-10.6,-0.25) 20(-10.6,-0.75) 21(-10.6,-1.25) 22(-10.6,-1.75) 23(-10.6,-2.25) 24(-10.6,-2.75) 25(-10.6,-3.25) 26(-10.6,-3.75) 27(-10.6,-4.25) 28(-10.6,-4.75) 29(-10.6,-5.25) 30(-10.6,-5.75) 31(-10.6,-6.25) 32(-10.6,-6.75) 33(-10.6,-7.25) 34(-10.6,-7.75) 35(-10.6,-8.25) 36(-10.6,-8.75) 73(10.6,-8.75) 74(10.6,-8.25) 75(10.6,-7.75) 76(10.6,-7.25) 77(10.6,-6.75) 78(10.6,-6.25) 79(10.6,-5.75) 80(10.6,-5.25) 81(10.6,-4.75) 82(10.6,-4.25) 83(10.6,-3.75) 84(10.6,-3.25) 85(10.6,-2.75) 86(10.6,-2.25) 87(10.6,-1.75) 88(10.6,-1.25) 89(10.6,-0.75) 90(10.6,-0.25) 91(10.6,0.25) 92(10.6,0.75) 93(10.6,1.25) 94(10.6,1.75) 95(10.6,2.25) 96(10.6,2.75) 97(10.6,3.25) 98(10.6,3.75) 99(10.6,4.25) 100(10.6,4.75) 101(10.6,5.25) 102(10.6,5.75) 103(10.6,6.25) 104(10.6,6.75) 105(10.6,7.25) 106(10.6,7.75) 107(10.6,8.25) 108(10.6,8.75)
  oval 0.3x1.7 smd: 37(-8.75,-10.55) 38(-8.25,-10.55) 39(-7.75,-10.55) 40(-7.25,-10.55) 41(-6.75,-10.55) 42(-6.25,-10.55) 43(-5.75,-10.55) 44(-5.25,-10.55) 45(-4.75,-10.55) 46(-4.25,-10.55) 47(-3.75,-10.55) 48(-3.25,-10.55) 49(-2.75,-10.55) 50(-2.25,-10.55) 51(-1.75,-10.55) 52(-1.25,-10.55) 53(-0.75,-10.55) 54(-0.25,-10.55) 55(0.25,-10.55) 56(0.75,-10.55) 57(1.25,-10.55) 58(1.75,-10.55) 59(2.25,-10.55) 60(2.75,-10.55) 61(3.25,-10.55) 62(3.75,-10.55) 63(4.25,-10.55) 64(4.75,-10.55) 65(5.25,-10.55) 66(5.75,-10.55) 67(6.25,-10.55) 68(6.75,-10.55) 69(7.25,-10.55) 70(7.75,-10.55) 71(8.25,-10.55) 72(8.75,-10.55) 109(8.75,10.55) 110(8.25,10.55) 111(7.75,10.55) 112(7.25,10.55) 113(6.75,10.55) 114(6.25,10.55) 115(5.75,10.55) 116(5.25,10.55) 117(4.75,10.55) 118(4.25,10.55) 119(3.75,10.55) 120(3.25,10.55) 121(2.75,10.55) 122(2.25,10.55) 123(1.75,10.55) 124(1.25,10.55) 125(0.75,10.55) 126(0.25,10.55) 127(-0.25,10.55) 128(-0.75,10.55) 129(-1.25,10.55) 130(-1.75,10.55) 131(-2.25,10.55) 132(-2.75,10.55) 133(-3.25,10.55) 134(-3.75,10.55) 135(-4.25,10.55) 136(-4.75,10.55) 137(-5.25,10.55) 138(-5.75,10.55) 139(-6.25,10.55) 140(-6.75,10.55) 141(-7.25,10.55) 142(-7.75,10.55) 143(-8.25,10.55) 144(-8.75,10.55)
  silkscreen extent -12.5,-12.5 12.5,12.5, body extent -11,-11 11,11, height 1.71
AP7-00039 [mm] "FOX FQ5032B"
  rect 1.6x1.3 smd: 1(-1.9,-1.15) 2(1.9,-1.15) 3(1.9,1.15) 4(-1.9,1.15)
  silkscreen extent -3,-2.1 3,2.1, body extent -2.5,-1.6 2.5,1.6, height 1
AP7-00044 [mm]
  rect 1x1.6 smd: 1(-1.3,0) 2(1.3,0)
  rect 3x2.5 smd: 3(0,6.25)
  silkscreen extent -2,-1 2,7.7, body extent -1.5,-0.7 1.5,7.4, height 2.08
BGA_100_C_100P_10X17_1400X1800X150 [mm] "BGA, 100-Leads, Body 14.00x18.00mmx1.50mm, Pitch 1.00mm"
  round 0.49 smd: A1(-4.5,8) A2(-3.5,8) A9(3.5,8) A10(4.5,8) B1(-4.5,7) B10(4.5,7) D2(-3.5,5) D3(-2.5,5) D4(-1.5,5) D5(-0.5,5) D6(0.5,5) D7(1.5,5) D8(2.5,5) D9(3.5,5) E2(-3.5,4) E3(-2.5,4) E4(-1.5,4) E5(-0.5,4) E6(0.5,4) E7(1.5,4) E8(2.5,4) E9(3.5,4) F2(-3.5,3) F3(-2.5,3) F4(-1.5,3) F5(-0.5,3) F6(0.5,3) F7(1.5,3) F8(2.5,3) F9(3.5,3) G2(-3.5,2) G3(-2.5,2) G4(-1.5,2) G5(-0.5,2) G6(0.5,2) G7(1.5,2) G8(2.5,2) G9(3.5,2) H2(-3.5,1) H3(-2.5,1) H4(-1.5,1) H5(-0.5,1) H6(0.5,1) H7(1.5,1) H8(2.5,1) H9(3.5,1) J2(-3.5,0) J3(-2.5,0) J4(-1.5,0) J5(-0.5,0) J6(0.5,0) J7(1.5,0) J8(2.5,0) J9(3.5,0) K2(-3.5,-1) K3(-2.5,-1) K4(-1.5,-1) K5(-0.5,-1) K6(0.5,-1) K7(1.5,-1) K8(2.5,-1) K9(3.5,-1) L2(-3.5,-2) L3(-2.5,-2) L4(-1.5,-2) L5(-0.5,-2) L6(0.5,-2) L7(1.5,-2) L8(2.5,-2) L9(3.5,-2) M2(-3.5,-3) M3(-2.5,-3) M4(-1.5,-3) M5(-0.5,-3) M6(0.5,-3) M7(1.5,-3) M8(2.5,-3) M9(3.5,-3) N2(-3.5,-4) N3(-2.5,-4) N4(-1.5,-4) N5(-0.5,-4) N6(0.5,-4) N7(1.5,-4) N8(2.5,-4) N9(3.5,-4) P2(-3.5,-5) P3(-2.5,-5) P4(-1.5,-5) P5(-0.5,-5) P6(0.5,-5) P7(1.5,-5) P8(2.5,-5) P9(3.5,-5) T1(-4.5,-7) T10(4.5,-7) U1(-4.5,-8) U2(-3.5,-8) U9(3.5,-8) U10(4.5,-8)
  round 0.35 on Mech8 paste+0 mask+0: A1(-4.5,8) A2(-3.5,8) A9(3.5,8) A10(4.5,8) B1(-4.5,7) B10(4.5,7) D2(-3.5,5) D3(-2.5,5) D4(-1.5,5) D5(-0.5,5) D6(0.5,5) D7(1.5,5) D8(2.5,5) D9(3.5,5) E2(-3.5,4) E3(-2.5,4) E4(-1.5,4) E5(-0.5,4) E6(0.5,4) E7(1.5,4) E8(2.5,4) E9(3.5,4) F2(-3.5,3) F3(-2.5,3) F4(-1.5,3) F5(-0.5,3) F6(0.5,3) F7(1.5,3) F8(2.5,3) F9(3.5,3) G2(-3.5,2) G3(-2.5,2) G4(-1.5,2) G5(-0.5,2) G6(0.5,2) G7(1.5,2) G8(2.5,2) G9(3.5,2) H2(-3.5,1) H3(-2.5,1) H4(-1.5,1) H5(-0.5,1) H6(0.5,1) H7(1.5,1) H8(2.5,1) H9(3.5,1) J2(-3.5,0) J3(-2.5,0) J4(-1.5,0) J5(-0.5,0) J6(0.5,0) J7(1.5,0) J8(2.5,0) J9(3.5,0) K2(-3.5,-1) K3(-2.5,-1) K4(-1.5,-1) K5(-0.5,-1) K6(0.5,-1) K7(1.5,-1) K8(2.5,-1) K9(3.5,-1) L2(-3.5,-2) L3(-2.5,-2) L4(-1.5,-2) L5(-0.5,-2) L6(0.5,-2) L7(1.5,-2) L8(2.5,-2) L9(3.5,-2) M2(-3.5,-3) M3(-2.5,-3) M4(-1.5,-3) M5(-0.5,-3) M6(0.5,-3) M7(1.5,-3) M8(2.5,-3) M9(3.5,-3) N2(-3.5,-4) N3(-2.5,-4) N4(-1.5,-4) N5(-0.5,-4) N6(0.5,-4) N7(1.5,-4) N8(2.5,-4) N9(3.5,-4) P2(-3.5,-5) P3(-2.5,-5) P4(-1.5,-5) P5(-0.5,-5) P6(0.5,-5) P7(1.5,-5) P8(2.5,-5) P9(3.5,-5) T1(-4.5,-7) T10(4.5,-7) U1(-4.5,-8) U2(-3.5,-8) U9(3.5,-8) U10(4.5,-8)
  silkscreen extent -7.77,-9 7,9, body extent -7,-9 7,9, height 1.5
CAP_C_0402 [mm] "Chip Capacitor, 2-Leads, Body 1.0x0.5mm, IPC High Density"
  rrect50% 0.55x0.6 smd: 1(-0.45,0) 2(0.45,0)
  body extent -0.5,-0.3 0.5,0.3, height 0.2
CAP_C_0603 [mm] "Chip Capacitor, 2-Leads, Body 1.6x0.8mm, IPC Medium Density"
  rrect50% 0.8x0.9 smd: 1(-0.8,0) 2(0.8,0)
  silkscreen extent -0.1,-0.38 0.1,0.38, body extent -0.8,-0.4 0.8,0.4, height 0.3
CAP_C_1005X60#1 [mm]
  rrect50% 0.65x0.6 smd mask+0.05: 1(-0.525,0) 2(0.525,0)
  silkscreen extent -0.08,-0.3 0.08,0.3, body extent -0.5,-0.26 0.5,0.27, height 0.35
CAP_C_1005X60#2 [mm]
  rrect50% 0.65x0.6 smd mask+0.05: 1(-0.5,0) 2(0.5,0)
  silkscreen extent -0.08,-0.3 0.08,0.3, body extent -0.5,-0.26 0.5,0.27, height 0.35
CAP_C_1608X80#1 [mm] "Chip Capacitor, 2-Leads, Body 1.60x0.80mm, IPC Medium Density"
  rrect50% 0.85x0.95 smd: 1(-0.775,0) 2(0.775,0)
  silkscreen extent -0.9,-0.7 0.9,0.7, body extent -0.87,-0.48 0.87,0.48, height 0.85
CAP_C_1608X80#2 [mm] "Chip Capacitor, 2-Leads, Body 1.60x0.80mm, IPC Medium Density"
  rrect50% 0.85x0.95 smd: 1(-0.8,0) 2(0.8,0)
  silkscreen extent -0.9,-0.7 0.9,0.7, body extent -0.87,-0.48 0.87,0.48, height 0.85
CAP_C_2012X110 [mm] "Chip Capacitor, 2-Leads, Body 2.00x1.25mm, IPC High Density"
  rrect41% 1.2x1.3 smd: 1(-0.9,0) 2(0.9,0)
  silkscreen extent -1.1,-0.9 1.1,0.9, body extent -1.1,-0.72 1.1,0.72, height 1.1
CAP_C_3225X80 [mm] "Chip Capacitor, 2-Leads, Body 3.20x2.50mm, IPC Medium Density"
  rrect38% 1.3x2.7 smd: 1(-1.4,0) 2(1.4,0)
  silkscreen extent -0.6,-1.35 0.6,1.35, body extent -1.7,-1.35 1.7,1.35, height 0.75
CRYSTAL_ABM8G [mil]
  rect 55x47 smd: 1(-43.5,-33.5) 2(43.5,-33.5) 3(43.5,33.5) 4(-43.5,33.5)
  silkscreen extent -81,-67 81,67, body extent -63,-49 63,49, height 40
CRYSTAL_NX2012SA [mil] "Crystal NDK NX2012SA"
  rect 40x50 smd paste-1: 1(-30,0) 2(30,0)
  silkscreen extent -64,-39 64,39, body extent -40,-20 40,20, height 21
DFN-4_2.5x2 [mm] "Oscillator DSC1121"
  rrect50% 0.65x0.9 smd: 1(-0.825,-0.8) 2(0.825,-0.8) 3(0.825,0.8) 4(-0.825,0.8)
  silkscreen extent -1.5,-1.55 1.5,1.55, body extent -1.25,-1 1.25,1, height 0.86
DFN-4_2x1.6 [mm] "MEMS Oscillator"
  rrect50% 0.5x0.7 smd: 1(-0.775,-0.525) 2(0.775,-0.525) 3(0.775,0.525) 4(-0.775,0.525)
  silkscreen extent -1.33,-1.18 1.33,1.17, body extent -1,-0.8 1,0.8, height 0.86
DO-214AC_SMA [mm] "Molded Diode, 2-Leads, Body 5.20x2.61mm, IPC Medium Density"
  rrect30% 2.55x1.65 smd: 1(-2.05,0) 2(2.05,0)
  silkscreen extent -3.6,-1.5 2.8,1.5, body extent -2.6,-1.3 2.6,1.3, height 2.4
Header_254P_8x1 [mm]
  rect 1.6x1.6 hole 1.1: 1(-8.89,0)
  round 1.6 hole 1.1: 2(-6.35,0) 3(-3.81,0) 4(-1.27,0) 5(1.27,0) 6(3.81,0) 7(6.35,0) 8(8.89,0)
  silkscreen extent -10.16,-1.27 10.16,1.27
HEX-M3_NoVia [mm]
  round 6 / inner round 4.4 / far side round 6 hole 3.18: 1(0,0)
IC_RV-3129-C3_32.768KHZ_OPTION_A_TB_QA [mm]
  rect 0.8x0.5 smd mask+0.05: 1(-1.1,1.6) 2(-1.1,0.8) 3(-1.1,0) 4(-1.1,-0.8) 5(-1.1,-1.6) 6(1.1,-1.6) 7(1.1,-0.8) 8(1.1,0) 9(1.1,0.8) 10(1.1,1.6)
  silkscreen extent -2.25,-1.85 0.38,1.85, body extent -1.25,-1.85 1.25,1.85, height 0.9
IND_C_1008 [mm]
  rect 0.9x2.4 smd mask+0.075: 1(-1,0) 2(1,0)
  silkscreen extent -0.25,-1.1 0.25,1.1, body extent -1.24,-1 1.26,1, height 1.2
JUMPER_1608 [mil]
  round 1 smd: 1(30.51,0)
  round 1 smd paste-99999 mask+4: 2(-30,0)
  Top Layer region: -14.86,-0.09 3.75,-18.7 -38.37,-18.7 -41.57,-18.06 -44.28,-16.25 -46.1,-13.54 -46.73,-10.33 -46.73,-10.33 -46.73,10.33 -46.1,13.54 -44.28,16.25 -41.57,18.06 -38.37,18.7 -38.37,18.7 3.93,18.7
  Top Layer region: 38.88,-18.7 13.56,-18.7 -5,0 13.56,18.7 38.88,18.7 42.08,18.06 44.79,16.25 46.61,13.54 47.24,10.33 47.24,10.33 47.24,-10.33 46.61,-13.54 44.79,-16.25 42.08,-18.06 38.88,-18.7
  silkscreen extent -40,-27 41,27
L-SMD-M-3.5x3.5x2mm [mm]
  rect 1.5x1 smd: 1(0.032,-1.385) 2(0.032,1.461)
  silkscreen extent -1.73,-2.2 1.73,2.2, body extent -1.58,-1.73 1.62,1.76, height 1.84
LED-0603-BLUE [mm] "LED SMD; Body 1.6 x 0.8 mm (LxW typ)"
  rect 1.1x1 smd mask+0.1: 1(-0.851,0) 2(0.849,0)
  silkscreen extent -1.71,-0.81 1.78,0.81, body extent -0.8,-0.4 0.8,0.4, height 0.75
LED_0402 [mm]
  rrect50% 0.65x0.6 smd mask+0.05: 1(-0.525,0) 2(0.525,0)
  silkscreen extent -1,-0.5 0.5,0.5, body extent -0.51,-0.25 0.51,0.25, height 0.45
MOLEX_0532610271 [mm]
  rect 0.8x1.6 smd mask+0.076: 1(-0.625,2.4) 2(0.625,2.4)
  rect 2.1x3 smd mask+0.076: M1(-3.175,-0.5) M2(3.175,-0.5)
  silkscreen extent -3.83,-2.6 3.83,4.64, body extent -3.83,-2.6 3.83,2.6, height 3.4
MOLEX_0532610471 [mm]
  rect 0.8x1.6 smd mask+0.076: 1(-1.875,2.4) 2(-0.625,2.4) 3(0.625,2.4) 4(1.875,2.4)
  rect 2.1x3 smd mask+0.076: M1(-4.425,-0.5) M2(4.425,-0.5)
  silkscreen extent -5.07,-2.6 5.07,4.75, body extent -5.07,-2.6 5.07,2.6, height 3.4
MOLEX_0532610571 [mm]
  rect 0.8x1.6 smd mask+0.076: 1(-2.5,2.4) 2(-1.25,2.4) 3(0,2.4) 4(1.25,2.4) 5(2.5,2.4)
  rect 2.1x3 smd mask+0.076: M1(-5.05,-0.5) M2(5.05,-0.5)
  silkscreen extent -5.7,-2.6 5.7,4.02, body extent -5.7,-2.6 5.7,2.6, height 3.2
MOLEX_0532610671 [mm]
  rect 0.8x1.6 smd: 1(-3.125,1.45) 2(-1.875,1.45) 3(-0.625,1.45) 4(0.625,1.45) 5(1.875,1.45) 6(3.125,1.45)
  rect 2.1x3 smd: M1(-5.675,-1.45) M2(5.675,-1.45)
  silkscreen extent -6.12,-3.55 6.12,2.85, body extent -6.32,-3.43 6.32,1.77, height 3.4
MOLEX_0532610971 [mm]
  rect 0.8x1.6 smd mask+0.076: 1(-5,2.4) 2(-3.75,2.4) 3(-2.5,2.4) 4(-1.25,2.4) 5(0,2.4) 6(1.25,2.4) 7(2.5,2.4) 8(3.75,2.4) 9(5,2.4)
  rect 2.1x3 smd mask+0.076: M1(-7.55,-0.5) M2(7.55,-0.5)
  silkscreen extent -8.2,-2.6 8.2,3.4, body extent -8.2,-2.6 8.2,2.6, height 3.4
MOLEX_0532611171 [mm]
  rect 0.8x1.6 smd mask+0.076: 1(-6.25,2.4) 2(-5,2.4) 3(-3.75,2.4) 4(-2.5,2.4) 5(-1.25,2.4) 6(0,2.4) 7(1.25,2.4) 8(2.5,2.4) 9(3.75,2.4) 10(5,2.4) 11(6.25,2.4)
  rect 2.1x3 smd mask+0.076: M1(-8.8,-0.5) M2(8.8,-0.5)
  silkscreen extent -9.45,-2.6 9.45,3.35, body extent -9.45,-2.6 9.45,2.6, height 3.4
Molex_1051620001 [mil]
  rect 115x22 smd: 14(-84.45,146.35) 15(80.51,146.35)
  rect 41x43 smd: G1(209.65,17.02)
  rect 41x47 smd: G2(209.65,119.78) G3(-209.64,97.33)
  rect 41x94 smd: G4(-209.65,-28.06)
  rect 20x39 smd: P1(139.76,-138.49) P2(96.46,-138.49) P3(53.15,-138.49) P4(9.84,-138.49) P5(-33.46,-138.49) P6(-76.77,-138.49) P7(-120.08,-138.49) P8(-163.39,-138.49)
  rect 28x31 smd: P9(209.06,-32.98)
  silkscreen extent -228,-169 228,154, body extent -222,-485 226,150, height 59
MOLEX_5040500291 [mil]
  rect 26x41 smd paste+0 mask+0: 1(29.53,-119.76) 2(-29.53,-119.76)
  rect 51x73 smd paste+0 mask+0: M1(132.09,84.57) M2(-132.09,84.57)
  silkscreen extent -138,-152 138,125, body extent -149,-132 149,121, height 79
MOLEX_5040500891 [mm]
  rect 0.6x1 smd mask+0.076: 1(5.25,-2.87) 2(3.75,-2.87) 3(2.25,-2.87) 4(0.75,-2.87) 5(-0.75,-2.87) 6(-2.25,-2.87) 7(-3.75,-2.87) 8(-5.25,-2.87)
  rect 1.25x1.8 smd mask+0.076: M1(7.855,2.32) M2(-7.855,2.32)
  silkscreen extent -8.27,-3.7 8.27,3.22, body extent -8.27,-3.2 8.27,3.24, height 2